# Altium PCB DIO_MCX_mezzanine.PCBDOC (part 1 of 2)
Units mil, origin at the board's own origin, x right, y up, seen from the top; angles counter-clockwise.
Board outline 2519.69 x 3937 mil, 4 copper layers (L1, P2, P3, L4), stack 61.85 mil thick; 119 components, 65 nets, 382 pads, 96 vias.
Unrouted connection lines stored in the file: 38.
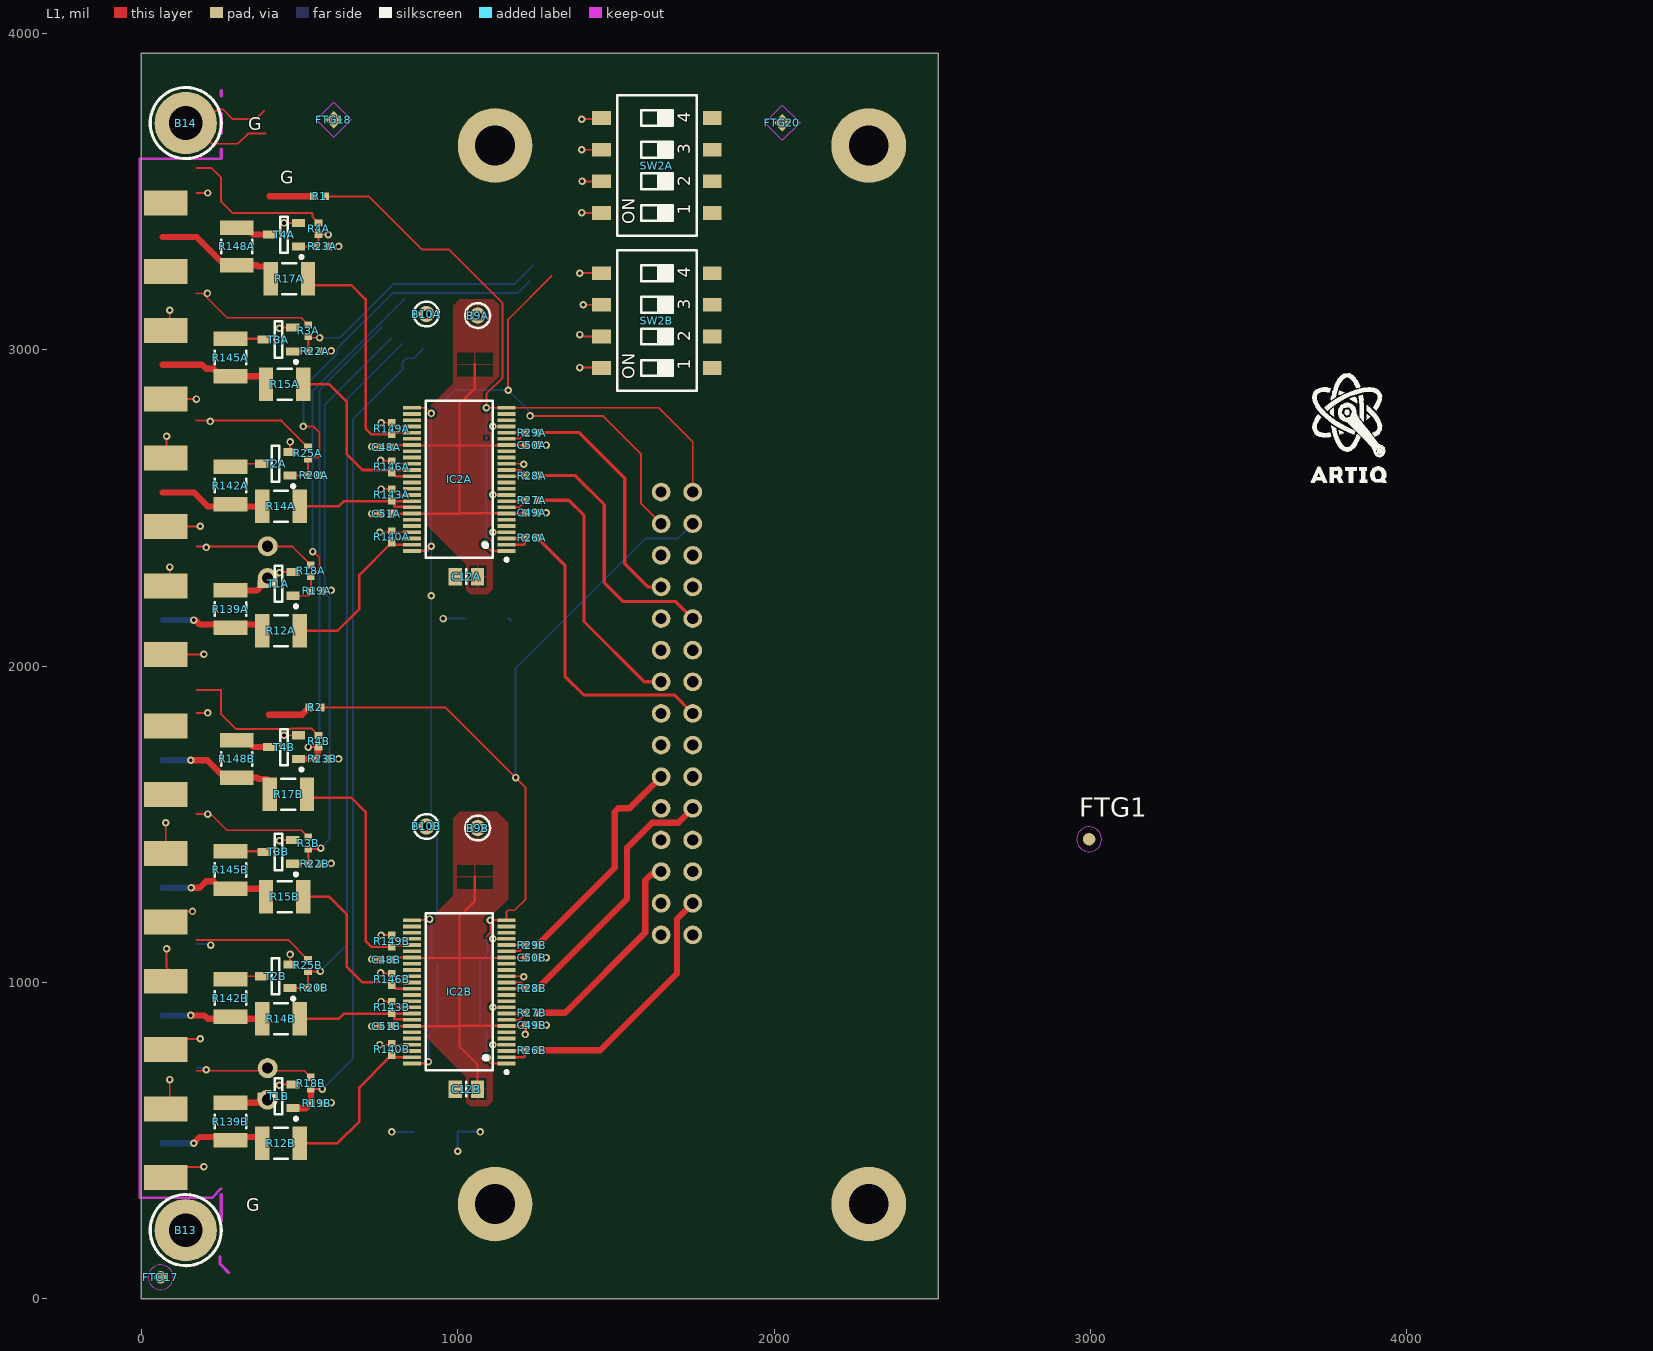
[diagram p0: L1 view]
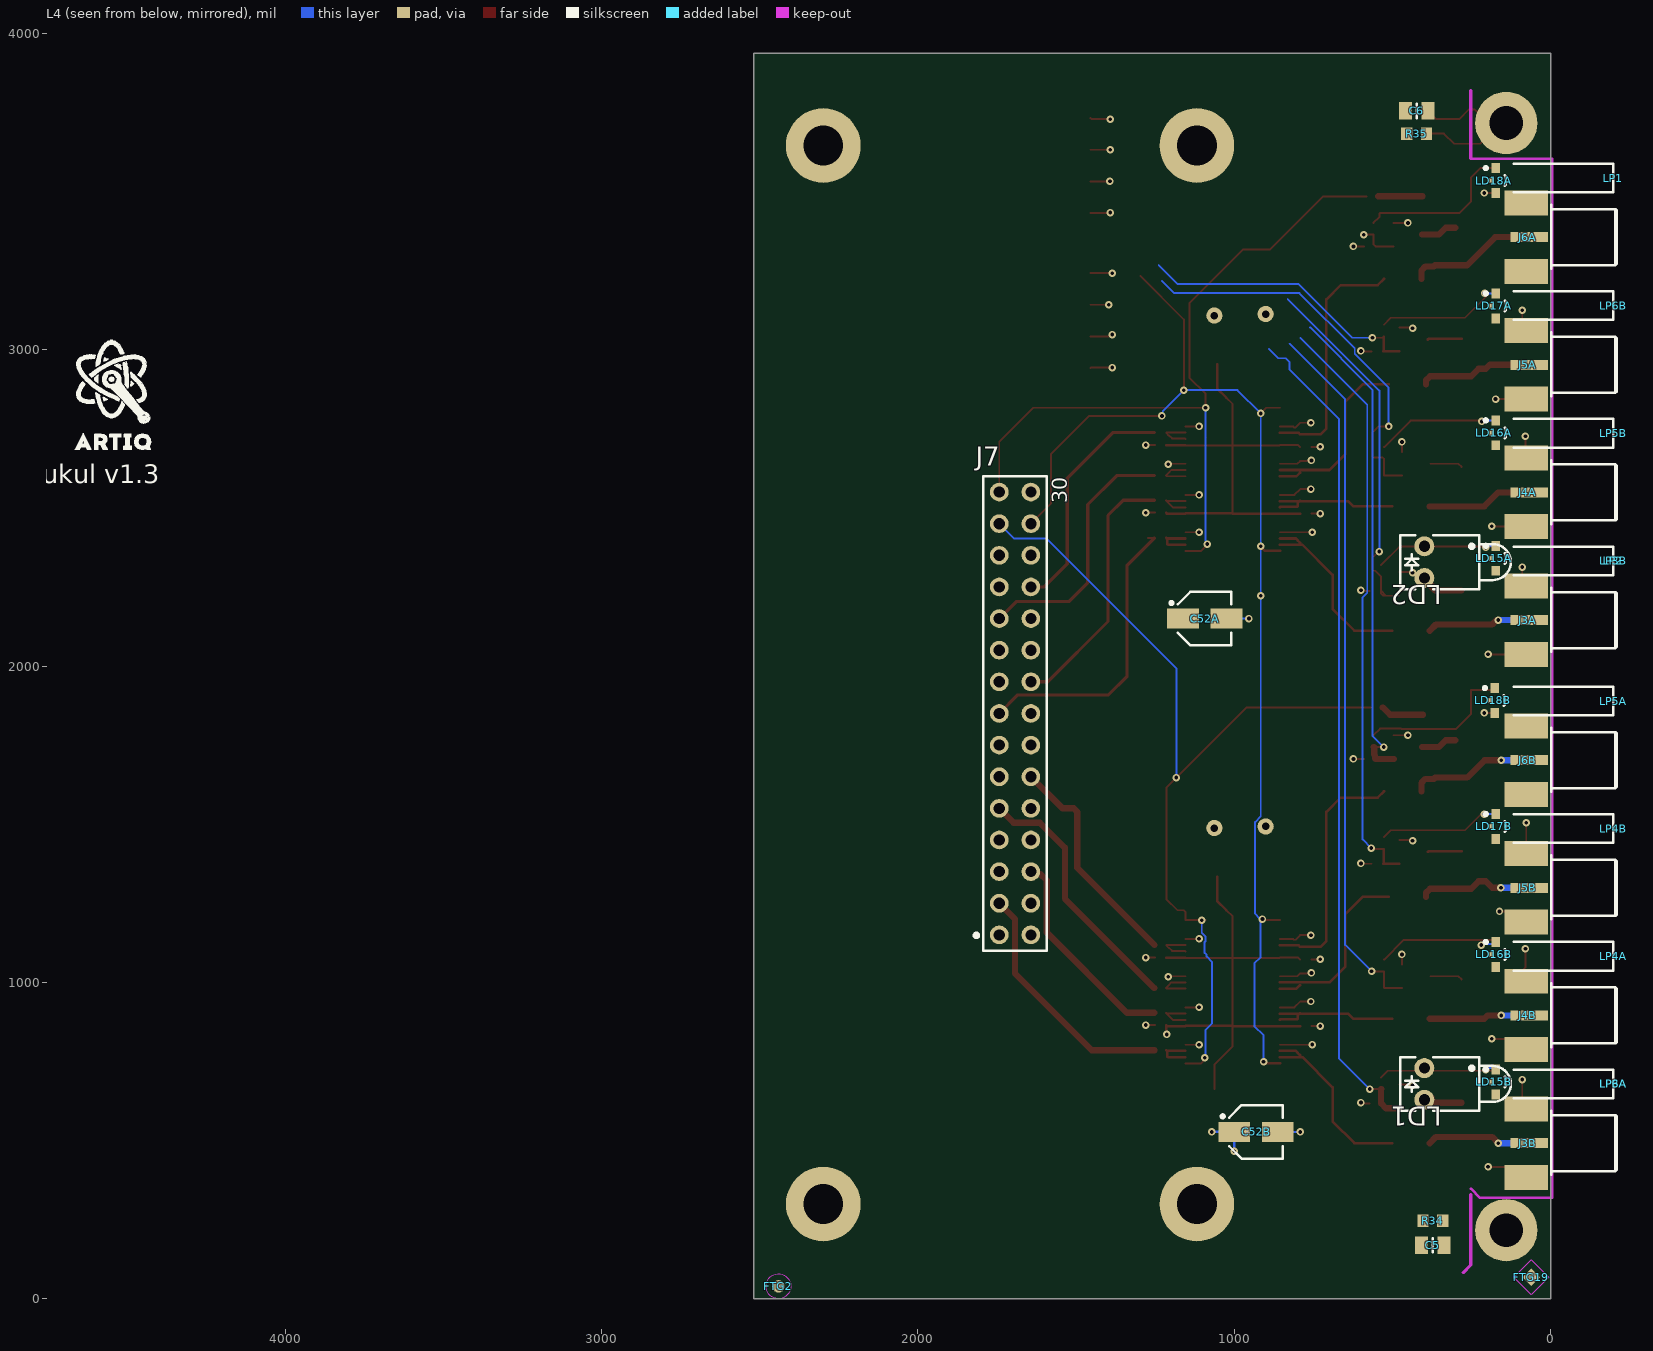
[diagram p1: L4 view, seen from below]
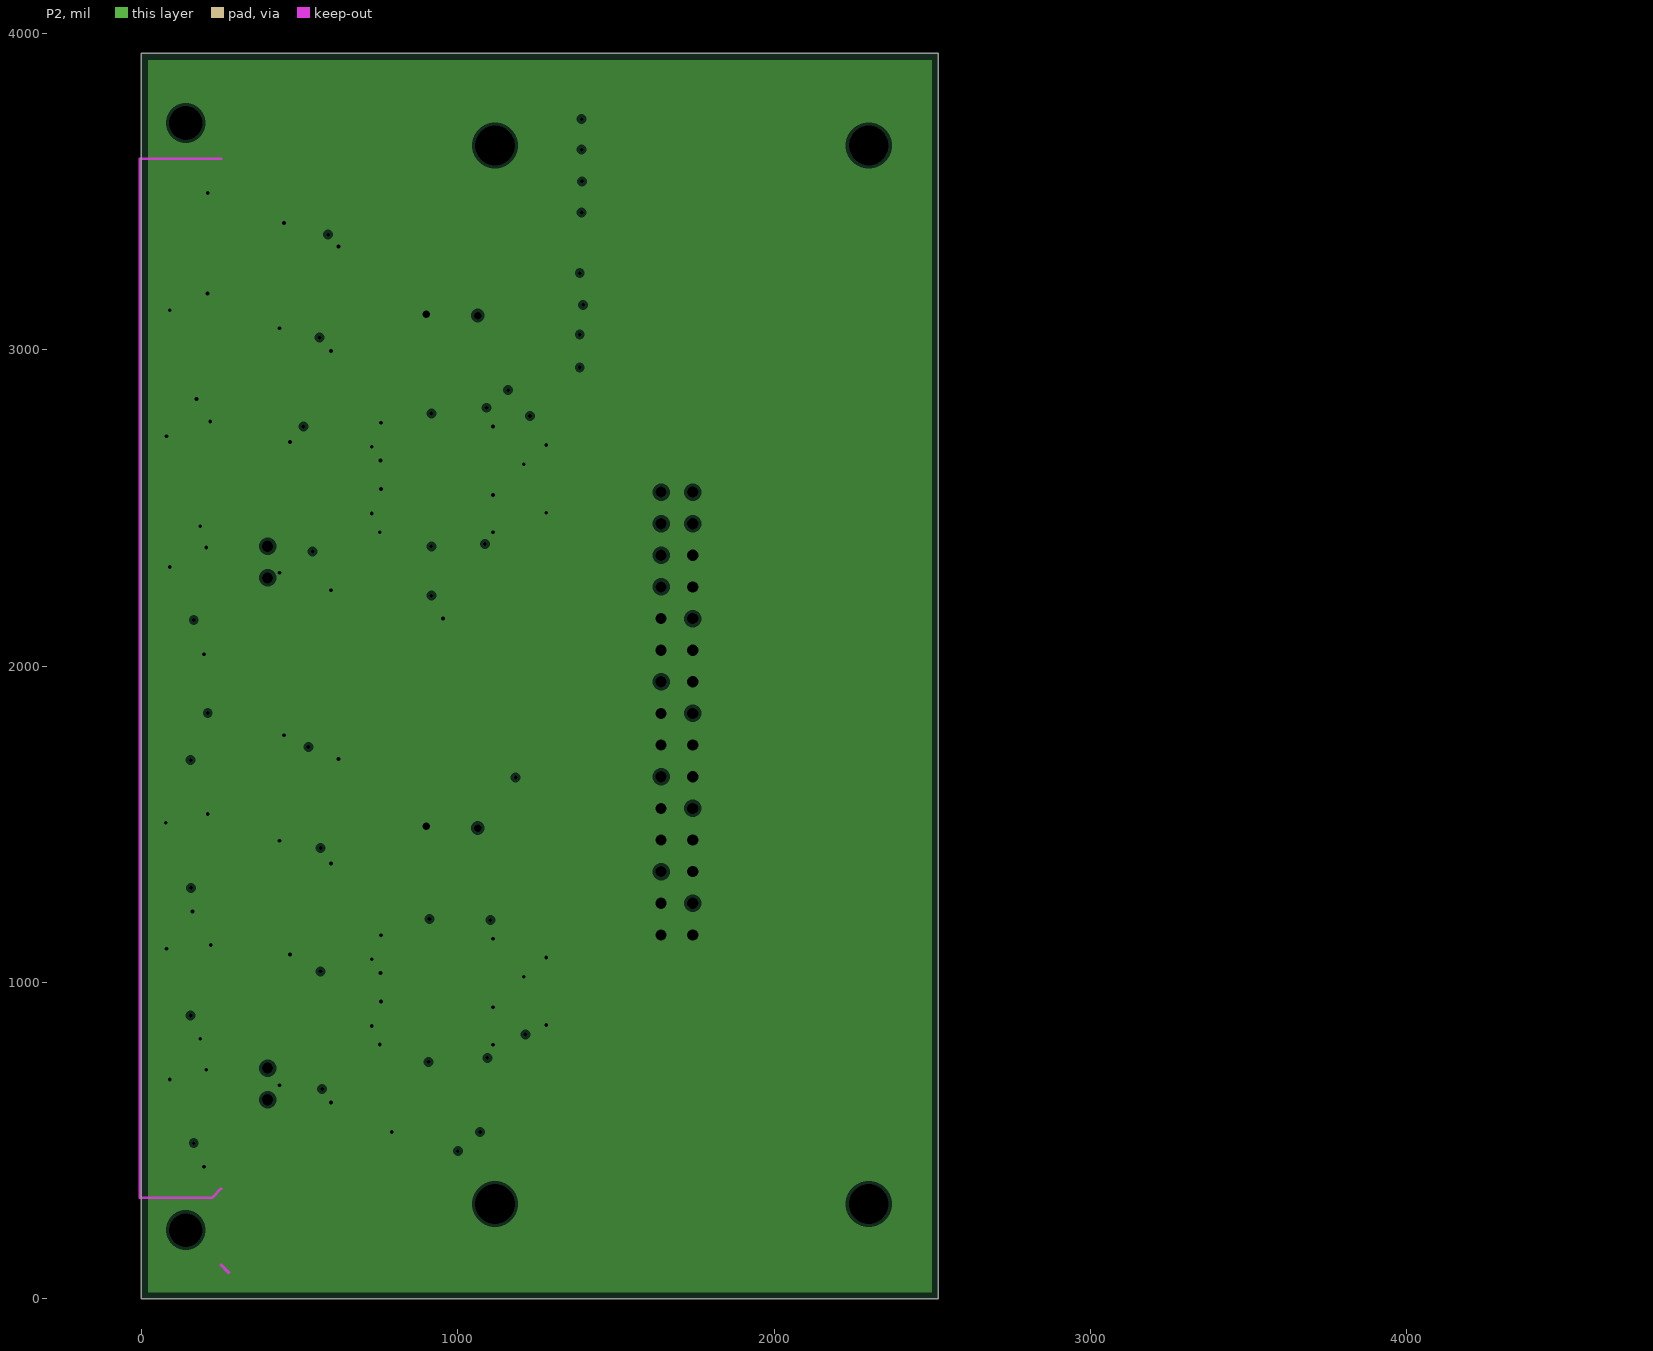
[diagram p2: P2, clearances drawn from the general rule]
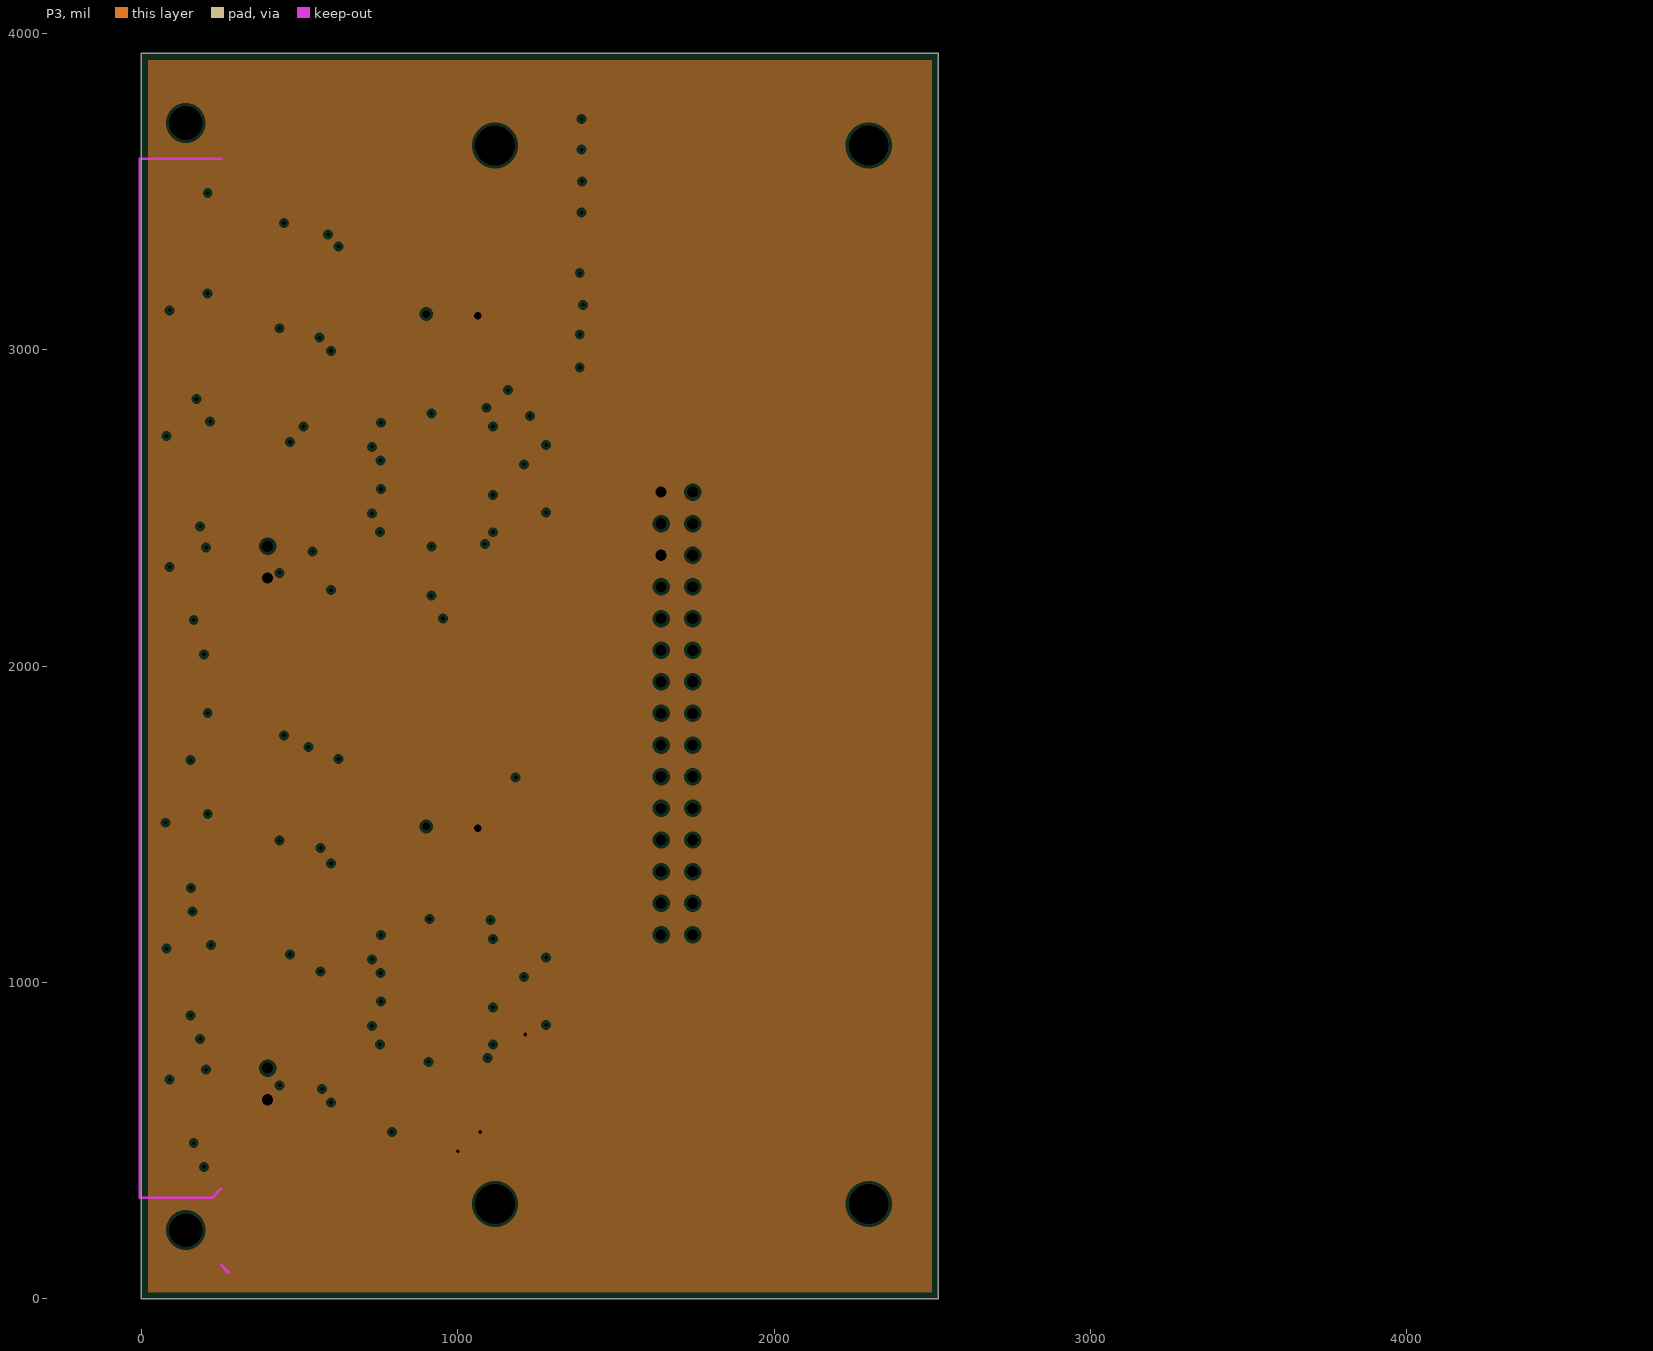
[diagram p3: P3, clearances drawn from the general rule]

## Layer stack, top to bottom
Top Solder: solder mask 1.339, Solder Resist, Dk 3.5
L1: signal copper 1.3779
Dielectric 2: prepreg 7.874, 7628, Dk 4.1
P2: plane copper 0.7087, net GND
Dielectric 3: prepreg 41.9291, PP-006, Dk 4.1
P3: plane copper 0.7087, net P3V3
Dielectric 1: prepreg 7.874, 7628, Dk 4.1
L4: signal copper 1.3779
Bottom Solder: solder mask 1.339, Solder Resist, Dk 3.5

## Board outline
0,300.2 0,3189.96 0,3622.05 0,3937 2519.68,3937 2519.69,0 0,0

## Design rules (kind name [scope] priority, off if disabled: settings)
AcuteAngle AcuteAngle_GND [InNet('GND')] p1: minimum=5.00000000000000E+0001 checktracksonly=FALSE
AcuteAngle [All] p2: minimum=5.00000000000000E+0001 checktracksonly=FALSE
Clearance Clearance_1 [InPolygon vs (InDifferentialPairClass('All Differential Pairs'))] p1: gap=10 ignorepadtopadclearanceinfootprint=FALSE except(0: Arc-Hole Track-Hole SMDPad-Hole THPad-Hole Via-Hole Fill-Hole Poly-Hole Region-Hole Text-Hole; 20: Track-Poly)
Clearance Clearance_KeepOut [OnLayer('Keep-Out Layer') vs NOT (InComponent('J8') OR InComponent('J11'))] p2: gap=5 ignorepadtopadclearanceinfootprint=FALSE
Clearance Clearance_50_Ohms [InNetClass('50_Ohms')] p3: gap=7.87 ignorepadtopadclearanceinfootprint=FALSE except(0: Arc-Hole Track-Hole SMDPad-Hole THPad-Hole Via-Hole Fill-Hole Poly-Hole Region-Hole Text-Hole)
Clearance Clearance_DiffPair_1 [(InDifferentialPairClass('All Differential Pairs')) vs (InDifferentialPairClass('All Differential Pairs'))] p4 off: gap=11.81 ignorepadtopadclearanceinfootprint=FALSE except(0: Arc-Hole Track-Hole SMDPad-Hole THPad-Hole Via-Hole Fill-Hole Poly-Hole Region-Hole Text-Hole)
Clearance [Not (OnLayer('Keep-Out Layer'))] p5: gap=5 ignorepadtopadclearanceinfootprint=FALSE except(0: Arc-Hole Track-Hole SMDPad-Hole THPad-Hole Via-Hole Fill-Hole Poly-Hole Region-Hole Text-Hole; 8: Arc-Poly Track-Poly SMDPad-Poly THPad-Poly Via-Poly Fill-Poly Poly-Poly)
Clearance Clearance_abs [All] p6: gap=5 ignorepadtopadclearanceinfootprint=FALSE
ComponentClearance Clearance_ERNI [(HasFootprint('ERMET ZD 3-10 CONNECTOR')) vs (HasFootprint('ERMET ZD 3-10 CONNECTOR'))] p1: gap=0 collisioncheckmode=3 verticalgap=10 showdistances=FALSE
ComponentClearance Clearance_Radiall_Placement [HasFootprint('Coaxipack2') vs HasFootprint('Coaxipack2')] p2: gap=0 collisioncheckmode=3 verticalgap=10 showdistances=FALSE
ComponentClearance [All] p3: gap=10 collisioncheckmode=3 verticalgap=10 showdistances=FALSE
DiffPairsRouting CLK_DiffPairsRouting [(InDifferentialPairClass('All Differential Pairs'))] p1: maxlimit=7 minlimit=5 mostfreqgap=6 toplayer_minwidth=6 toplayer_maxwidth=6 toplayer_prefwidth=6 bottomlayer_minwidth=6 bottomlayer_maxwidth=6 bottomlayer_prefwidth=6 maxuncoupledlength=393.7
FabricationTestPointUsage TestPointUsage [All] p1: valid=0 allowmultiple=FALSE
FabricationTestpoint Testpoint [(IsPad And (OnTopLayer Or OnBottomLayer))] p1: side=3 testpointundercomponent=TRUE minsize=40 maxsize=100 preferedsize=60 minholesize=0 maxholesize=40 preferedholesize=32 testpointgrid=1 allowsidetop=TRUE allowsidebottom=TRUE usegrid=TRUE gridtolerance=0.01
Height BottomHeight [All] p1: minheight=0 maxheight=787.4 prefheight=393.7
Height TopHeight [OnLayer('Top Layer (LO)')] p2: minheight=0 maxheight=98.43 prefheight=39.37
HoleSize [All] p1: absolutevalues=TRUE maxlimit=196.85 minlimit=7.87 maxpercent=80.000 minpercent=20.000
HoleToHoleClearance [All] p1: gap=7.87 allowstackedmicrovias=TRUE
Length [All] p1 off: maxlimit=100000 minlimit=0
MatchedLengths MatchLengths_IC10_Passives_IC13A,IC13B,IC13C,IC13D,IC2A,IC2B,IC2C,IC2D_1 [InxSignalClass('xSignals_IC10_Passives_IC13A,IC13B,IC13C,IC13D,IC2A,IC2B,IC2C,IC2D_MatchLengthsClass')] p1: tolerance=100 checknetsindiffpair=FALSE checkdiffpairvsdiffpair=TRUE checkxsignals=TRUE checkothers=TRUE
MatchedLengths MatchLengths_xSignals_IC10_Passives_1 [InxSignalClass('xSignals_IC10_Passives_MatchLengthsClass_1')] p2: tolerance=100 checknetsindiffpair=FALSE checkdiffpairvsdiffpair=TRUE checkxsignals=TRUE checkothers=TRUE
MatchedLengths MatchLengths_xSignals_IC10_IC13A,IC13B,IC13C,IC13D,IC2A,IC2B,IC2C,IC2D_1 [InxSignalClass('xSignals_IC10_IC13A,IC13B,IC13C,IC13D,IC2A,IC2B,IC2C,IC2D_MatchLengthsClass')] p3: tolerance=100 checknetsindiffpair=FALSE checkdiffpairvsdiffpair=TRUE checkxsignals=TRUE checkothers=TRUE
MatchedLengths MatchLengths_IC10_Passives_IC13A,IC13B,IC13C,IC13D,IC2A,IC2B,IC2C,IC2D [InxSignalClass('xSignals_IC10_Passives_IC13A,IC13B,IC13C,IC13D,IC2A,IC2B,IC2C,IC2D_MatchLengthsClass')] p4: tolerance=100 checknetsindiffpair=FALSE checkdiffpairvsdiffpair=TRUE checkxsignals=TRUE checkothers=TRUE
MatchedLengths MatchLengths_xSignals_IC10_Passives [InxSignalClass('xSignals_IC10_Passives_MatchLengthsClass')] p5: tolerance=100 checknetsindiffpair=FALSE checkdiffpairvsdiffpair=TRUE checkxsignals=TRUE checkothers=TRUE
MatchedLengths MatchLengths_xSignals_IC10_IC13A,IC13B,IC13C,IC13D,IC2A,IC2B,IC2C,IC2D [InxSignalClass('xSignals_IC10_IC13A,IC13B,IC13C,IC13D,IC2A,IC2B,IC2C,IC2D_MatchLengthsClass')] p6: tolerance=100 checknetsindiffpair=FALSE checkdiffpairvsdiffpair=TRUE checkxsignals=TRUE checkothers=TRUE
MatchedLengths MatchLengths_xSignals_IC10_IC23A,IC23B,IC23C,IC23D [InxSignalClass('xSignals_IC10_IC23A,IC23B,IC23C,IC23D_MatchLengthsClass')] p7: tolerance=100 checknetsindiffpair=FALSE checkdiffpairvsdiffpair=TRUE checkxsignals=TRUE checkothers=TRUE
MatchedLengths Update [InxSignalClass('UPDATE')] p8: tolerance=196.85 checknetsindiffpair=FALSE checkdiffpairvsdiffpair=TRUE checkxsignals=TRUE checkothers=TRUE
MatchedLengths RFSW [InxSignalClass('RFSW')] p9: tolerance=196.85 checknetsindiffpair=FALSE checkdiffpairvsdiffpair=TRUE checkxsignals=TRUE checkothers=TRUE
MatchedLengths "IO 11 15" [InxSignalClass('IO11_15')] p10: tolerance=196.85 checknetsindiffpair=FALSE checkdiffpairvsdiffpair=TRUE checkxsignals=TRUE checkothers=TRUE
MatchedLengths "DDS SYNC" [InxSignalClass('DDSx_SYNC')] p11: tolerance=196.85 checknetsindiffpair=FALSE checkdiffpairvsdiffpair=TRUE checkxsignals=TRUE checkothers=TRUE
MatchedLengths "DDS RESET" [InxSignalClass('DDS_RESET')] p12: tolerance=196.85 checknetsindiffpair=FALSE checkdiffpairvsdiffpair=TRUE checkxsignals=TRUE checkothers=TRUE
MatchedLengths "CLK IC13" [InxSignalClass('CLK IC13')] p13: tolerance=196.85 checknetsindiffpair=FALSE checkdiffpairvsdiffpair=TRUE checkxsignals=TRUE checkothers=TRUE
MinimumAnnularRing MinimumAnnularRing_Blind [(InNetClass('50_Ohms') OR InDifferentialPairClass('All Differential Pairs'))] p1: minimumring=3.94
MinimumAnnularRing [All] p2: minimumring=3.94
MinimumSolderMaskSliver [All] p1: minsoldermaskwidth=1.97
PlaneClearance [All] p1: clearance=9.84
PlaneConnect PlaneConnect_pad [InPadClass('All Pads')] p1: planeconnectstyle=Relief reliefexpansion=20 reliefentries=4 reliefconductorwidth=10 reliefairgap=10
PlaneConnect [All] p2: planeconnectstyle=Direct reliefexpansion=20 reliefentries=4 reliefconductorwidth=10 reliefairgap=10
PolygonConnect PolygonConnect_pad [IsPad] p1: connectstyle=Relief reliefconductorwidth=5.91 reliefentries=4 polygonreliefangle="90 Angle" airgapwidth=6
PolygonConnect [All] p2: connectstyle=Direct reliefconductorwidth=10 reliefentries=4 polygonreliefangle="90 Angle" airgapwidth=10
RoomDefinition MCX_Mezzanine [InComponentClass('MCX_Mezzanine')] p1: confinementstyle=ConfineIn formatcopy=TRUE lockcomponents=FALSE outline 2562.99,-3.93 3192.92,-3.93 3192.92,1649.61 2562.99,1649.61
RoomDefinition U_MCX_BufferB [InComponentClass('U_MCX_BufferB')] p2: confinementstyle=ConfineIn formatcopy=TRUE lockcomponents=FALSE outline 0,347.14 1627.8,347.14 1627.8,1998.95 0,1998.95
RoomDefinition U_MCX_BufferA [InComponentClass('U_MCX_BufferA')] p3: confinementstyle=ConfineIn formatcopy=TRUE lockcomponents=FALSE outline 0,1967.22 1627.8,1967.22 1627.8,3619.03 0,3619.03
RoutingVias [All] p1: holewidth=11.81 width=23.62 viastyle="Through Hole" minholewidth=11.81 minwidth=23.62 maxholewidth=23.62 maxwidth=39.37
SMDNeckDown [All] p1: percent=100.000
SMDToCorner [All] p1: distance=78740
SMDToPlane [All] p1: distance=0
SilkToSilkClearance [All] p1: silktosilkclearance=0
SilkToSolderMaskClearance SilkscreenOverComponentPads [IsPad] p1: minsilkscreentomaskgap=0 clearancetoexposedcopper=TRUE
SolderMaskExpansion SolderMaskExpansion_GND_VIA [IsVia AND InNet('GND')] p1: expansion=-3.94
SolderMaskExpansion [All] p2: expansion=1.97
Width CLK_DiffPairs_Width [(InDifferentialPairClass('All Differential Pairs'))] p1: maxlimit=6 minlimit=6 preferedwidth=6 minimp=50.000000 maximp=50.000000 favimp=50.000000 checkconnectedcopper=TRUE
Width Width-SE [All] p2: maxlimit=19.68 minlimit=6 preferedwidth=6 minimp=49.000000 maximp=51.000000 favimp=50.000000
18 further rules are at their usual default settings.

## Classes and differential pairs
channel class MCX_Buffer: U_MCX_BufferA U_MCX_BufferB
component class U_MCX_BufferB: B9B B10B C12B C48B C49B C50B C51B C52B IC2B J3B J4B J5B J6B LD15B LD16B LD17B LD18B LP3B LP4B LP5B LP6B R3B R4B R12B R14B R15B R17B R18B R19B R20B R22B R23B R25B R26B R27B R28B R29B R139B R140B R142B R143B R145B R146B R148B R149B SW2B T1B T2B T3B T4B
component class MCX_Mezzanine: B13 B14 C5 C6 FTG1 FTG2 FTG17 FTG18 FTG19 FTG20 J7 LD1 LD2 LP1 LP2 R1 R2 R34 R35
component class U_MCX_BufferA: B9A B10A C12A C48A C49A C50A C51A C52A IC2A J3A J4A J5A J6A LD15A LD16A LD17A LD18A LP3A LP4A LP5A LP6A R3A R4A R12A R14A R15A R17A R18A R19A R20A R22A R23A R25A R26A R27A R28A R29A R139A R140A R142A R143A R145A R146A R148A R149A SW2A T1A T2A T3A T4A

## Components (designator, comment, footprint, x,y, rotation, side; value= is the part's Value field where it differs from the comment)
B9A "Plated Hole" c130h60 1062.99,3108.3 r270 top (schematic designator B9)
B9B "Plated Hole" c130h60 1062.99,1488.22 r270 top (schematic designator B9)
B10A "Plated Hole" c130h60 900.59,3113.19 r270 top (schematic designator B10)
B10B "Plated Hole" c130h60 900.59,1493.11 r270 top (schematic designator B10)
B13 "Plated Hole" MTG270_500 140,217 r180 top locked
B14 "Plated Hole" MTG270_500 140,3717 r180 top locked
C5 "Undefined" CAPC2012X135N 372.05,169.29 r180 bottom
C6 "Undefined" CAPC2012X135N 423.23,3755.43 r180 bottom
C12A "22uF" CAPC2012X135N 1027.56,2283.05 r0 top (schematic designator C12)
C12B "22uF" CAPC2012X135N 1027.56,662.97 r0 top (schematic designator C12)
C48A "100nF" CAPC1005X55N 773.62,2692.17 r0 top (schematic designator C48)
C48B "100nF" CAPC1005X55N 773.62,1072.09 r0 top (schematic designator C48)
C49A "100nF" CAPC1005X55N 1233.27,2485.28 r180 top (schematic designator C49)
C49B "100nF" CAPC1005X55N 1233.27,865.2 r180 top (schematic designator C49)
C50A "100nF" CAPC1005X55N 1233.27,2698.82 r180 top (schematic designator C50)
C50B "100nF" CAPC1005X55N 1233.27,1078.74 r180 top (schematic designator C50)
C51A "100nF" CAPC1005X55N 773.23,2482.28 r0 top (schematic designator C51)
C51B "100nF" CAPC1005X55N 773.23,862.2 r0 top (schematic designator C51)
C52A "10uF" CAPAE430X540N 1093.41,2150.39 r180 bottom locked (schematic designator C52)
C52B "10uF" CAPAE430X540N 931.22,527.56 r180 bottom locked (schematic designator C52)
FTG1 "Use only in PCB" FIDUCIAL_TOP_C100-200 2996.07,1452.76 r90 top
FTG2 "Use only in PCB" FIDUCIAL_TOP_C100-200 2440.94,39.37 r90 bottom
FTG17 "Use only in PCB" FIDUCIAL_TOP_C100-200 61.02,67.91 r270 top
FTG18 "Use only in PCB" FIDUCIAL_TOP_S100-200 607.68,3727.59 r270 top
FTG19 "Use only in PCB" FIDUCIAL_TOP_S100-200 61.02,67.91 r90 bottom
FTG20 "Use only in PCB" FIDUCIAL_TOP_S100-200 2026.58,3717.68 r270 top
IC2A "74LVT162245MTD" SOP50P810X120-48N 1004.92,2590.55 r180 top locked (schematic designator IC2)
IC2B "74LVT162245MTD" SOP50P810X120-48N 1004.92,970.47 r180 top locked (schematic designator IC2)
J3A "MCX" Belfuse_133-3701-801 165.35,2145.67 r180 bottom locked (schematic designator J3)
J3B "MCX" Belfuse_133-3701-801 165.35,491.84 r180 bottom locked (schematic designator J3)
J4A "MCX" Belfuse_133-3701-801 165.35,2549.21 r180 bottom locked (schematic designator J4)
J4B "MCX" Belfuse_133-3701-801 165.35,895.67 r180 bottom locked (schematic designator J4)
J5A "MCX" Belfuse_133-3701-801 165.35,2952.76 r180 bottom locked (schematic designator J5)
J5B "MCX" Belfuse_133-3701-801 165.35,1299.21 r180 bottom locked (schematic designator J5)
J6A "MCX" Belfuse_133-3701-801 165.35,3356.3 r180 bottom locked (schematic designator J6)
J6B "MCX" Belfuse_133-3701-801 165.35,1702.76 r180 bottom locked (schematic designator J6)
J7 "AMPMODU" TYCO_1-215307-5 1692.91,1400.39 r90 bottom locked
LD1 "Red" LED_DIALIGHT_551-1107F 398.94,679.14 r0 bottom locked
LD2 "Red" LED_DIALIGHT_551-1107F 398.94,2328.89 r0 bottom locked
LD15A "Green" LED_AVAGO_HSME-C120 173.23,2340.92 r270 bottom (schematic designator LD15)
LD15B "Green" LED_AVAGO_HSME-C120 173.23,685.61 r270 bottom (schematic designator LD15)
LD16A "Green" LED_AVAGO_HSME-C120 173.23,2737.67 r270 bottom (schematic designator LD16)
LD16B "Green" LED_AVAGO_HSME-C120 173.23,1088.58 r270 bottom (schematic designator LD16)
LD17A "Green" LED_AVAGO_HSME-C120 173.23,3139.07 r270 bottom (schematic designator LD17)
LD17B "Green" LED_AVAGO_HSME-C120 173.23,1493.11 r270 bottom (schematic designator LD17)
LD18A "Green" LED_AVAGO_HSME-C120 173.23,3535.17 r270 bottom (schematic designator LD18)
LD18B "Green" LED_AVAGO_HSME-C120 176.18,1891.47 r270 bottom (schematic designator LD18)
LP1 "=Color" FIX&FASTEN-LEMB2-8V0-F -198.82,3543.05 r0 bottom locked
LP2 "=Color" FIX&FASTEN-LEMB2-8V0-F -198.82,2332.68 r0 bottom locked
LP3A "Color" FIX&FASTEN-LEMB2-8V0-F -198.82,679.14 r0 bottom locked (schematic designator LP3)
LP3B "Color" FIX&FASTEN-LEMB2-8V0-F -198.82,2332.68 r0 bottom locked (schematic designator LP3)
LP4A "Color" FIX&FASTEN-LEMB2-8V0-F -198.82,1082.68 r0 bottom locked (schematic designator LP4)
LP4B "Color" FIX&FASTEN-LEMB2-8V0-F -198.82,1486.22 r0 bottom locked (schematic designator LP4)
LP5A "Color" FIX&FASTEN-LEMB2-8V0-F -198.82,1889.76 r0 bottom locked (schematic designator LP5)
LP5B "Color" FIX&FASTEN-LEMB2-8V0-F -198.82,2736.22 r0 bottom locked (schematic designator LP5)
LP6A "Color" FIX&FASTEN-LEMB2-8V0-F -198.82,679.14 r0 bottom locked (schematic designator LP6)
LP6B "Color" FIX&FASTEN-LEMB2-8V0-F -198.82,3139.76 r0 bottom locked (schematic designator LP6)
R1 "1k" RESC1005X40N 563.54,3485.17 r0 top
R2 "1k" RESC1005X40N 549.21,1869.56 r0 top
R3A "1k" RESC1005X40N 527.56,3060.28 r90 top (schematic designator R3)
R3B "1k" RESC1005X40N 527.56,1440.2 r90 top (schematic designator R3)
R4A "1k" RESC1005X40N 560,3382.68 r90 top (schematic designator R4)
R4B "1k" RESC1005X40N 560,1762.6 r90 top (schematic designator R4)
R12A "30R" RESC3225X70N 440.94,2111.92 r0 top (schematic designator R12)
R12B "30R" RESC3225X70N 440.94,491.84 r0 top (schematic designator R12)
R14A "30R" RESC3225X70N 440.94,2504.97 r0 top (schematic designator R14)
R14B "30R" RESC3225X70N 440.94,884.89 r0 top (schematic designator R14)
R15A "30R" RESC3225X70N 452.76,2890.68 r0 top (schematic designator R15)
R15B "30R" RESC3225X70N 452.76,1270.6 r0 top (schematic designator R15)
R17A "30R" RESC3225X70N 467.48,3224.41 r0 top (schematic designator R17)
R17B "30R" RESC3225X70N 464.24,1594.49 r0 top (schematic designator R17)
R18A "1k" RESC1005X40N 535.43,2301.55 r90 top (schematic designator R18)
R18B "1k" RESC1005X40N 535.43,681.48 r90 top (schematic designator R18)
R19A "10k" RESC1005X40N 554.13,2237.84 r180 top (schematic designator R19)
R19B "10k" RESC1005X40N 554.13,617.76 r180 top (schematic designator R19)
R20A "10k" RESC1005X40N 545.04,2603.28 r180 top (schematic designator R20)
R20B "10k" RESC1005X40N 545.04,983.2 r180 top (schematic designator R20)
R22A "10k" RESC1005X40N 547.24,2995.23 r180 top (schematic designator R22)
R22B "10k" RESC1005X40N 547.24,1375.15 r180 top (schematic designator R22)
R23A "10k" RESC1005X40N 571.85,3326.77 r180 top (schematic designator R23)
R23B "10k" RESC1005X40N 571.85,1706.69 r180 top (schematic designator R23)
R25A "1k" RESC1005X40N 526.54,2673.67 r90 top (schematic designator R25)
R25B "1k" RESC1005X40N 526.54,1053.59 r90 top (schematic designator R25)
R26A "22" RESC1005X40N 1233.27,2405.51 r0 top (schematic designator R26)
R26B "22" RESC1005X40N 1233.27,785.43 r0 top (schematic designator R26)
R27A "22" RESC1005X40N 1234.06,2524.26 r0 top (schematic designator R27)
R27B "22" RESC1005X40N 1234.06,904.18 r0 top (schematic designator R27)
R28A "22" RESC1005X40N 1234.06,2602.36 r0 top (schematic designator R28)
R28B "22" RESC1005X40N 1234.06,982.28 r0 top (schematic designator R28)
R29A "22" RESC1005X40N 1233.27,2738.19 r0 top (schematic designator R29)
R29B "22" RESC1005X40N 1233.27,1118.11 r0 top (schematic designator R29)
R34 "0" RESC1608X55N 372.05,246.79 r0 bottom
R35 "0" RESC1608X55N 423.23,3683.79 r0 bottom
R139A "49R9" RESC3225X70N 281.5,2180.43 r270 top (schematic designator R139)
R139B "49R9" RESC3225X70N 281.5,560.35 r270 top (schematic designator R139)
R140A "10k" RESC1005X40N 791.73,2408.61 r270 top (schematic designator R140)
R140B "10k" RESC1005X40N 791.73,788.53 r270 top (schematic designator R140)
R142A "49R9" RESC3225X70N 281.5,2570.87 r270 top (schematic designator R142)
R142B "49R9" RESC3225X70N 281.5,950.79 r270 top (schematic designator R142)
R143A "10k" RESC1005X40N 791.34,2541.34 r270 top (schematic designator R143)
R143B "10k" RESC1005X40N 791.34,921.26 r270 top (schematic designator R143)
R145A "49R9" RESC3225X70N 281.5,2975.64 r270 top (schematic designator R145)
R145B "49R9" RESC3225X70N 281.5,1355.56 r270 top (schematic designator R145)
R146A "10k" RESC1005X40N 791.73,2629.92 r270 top (schematic designator R146)
R146B "10k" RESC1005X40N 791.73,1009.84 r270 top (schematic designator R146)
R148A "49R9" RESC3225X70N 301.18,3326.77 r270 top (schematic designator R148)
R148B "49R9" RESC3225X70N 301.18,1706.69 r270 top (schematic designator R148)
R149A "10k" RESC1005X40N 791.73,2750.96 r270 top (schematic designator R149)
R149B "10k" RESC1005X40N 791.73,1130.88 r270 top (schematic designator R149)
SW2A "Switch" SW_OMRON_A6S-4102-H 1629.8,3582.68 r180 top locked (schematic designator SW2)
SW2B "Switch" SW_OMRON_A6S-4102-H 1629.8,3092.37 r180 top locked (schematic designator SW2)
T1A "BSS138LT1G" SOT95P240X110-3N 433.2,2259.99 r180 top (schematic designator T1)
T1B "BSS138LT1G" SOT95P240X110-3N 433.2,639.91 r180 top (schematic designator T1)
T2A "BSS138LT1G" SOT95P240X110-3N 424.53,2639.76 r180 top (schematic designator T2)
T2B "BSS138LT1G" SOT95P240X110-3N 424.53,1019.68 r180 top (schematic designator T2)
T3A "BSS138LT1G" SOT95P240X110-3N 433.07,3032.63 r180 top (schematic designator T3)
T3B "BSS138LT1G" SOT95P240X110-3N 433.07,1412.55 r180 top (schematic designator T3)
T4A "BSS138LT1G" SOT95P240X110-3N 450.79,3364.17 r180 top (schematic designator T4)
T4B "BSS138LT1G" SOT95P240X110-3N 450.79,1744.09 r180 top (schematic designator T4)

## Footprints (in the part's own frame and the unit in brackets; to place one, negate y for a bottom-side part, rotate by r counter-clockwise, add the part's x,y. Pads: shape width x height; smd on the part's side, far side on the other; paste and mask are expansions set on the pad)
Belfuse_133-3701-801 [mm] "50 Ohm, RF Connector, MCX Right Angle PCB Receptacle Jack"
  rect 3x0.8 smd: 1(2.5,0)
  rect 3.5x2 smd far side: 2(2.25,-2.75) 2(2.25,2.75)
  rect 3.5x2 smd: 2(2.25,-2.75) 2(2.25,2.75)
  silkscreen extent 4.25,-2.54 9.5,2.6, body extent 1.08,-3.18 9.61,3.17, height 3.42
c130h60 [mm] "Plated Through Hole: Hole Dia.=0.6mm Pad Dia.=1.30mm"
  round 1.3 hole 0.6: 1(0,0)
  silkscreen extent -1,-1 1,1
CAPAE430X540N [mm] "Capacitor, Aluminium Electrolytric, 4.3mm L X 4.3mm W X 5.4mm H, IPC Medium Density"
  rect 2.55x1.6 smd: 1(-1.75,0) 2(1.75,0)
  silkscreen extent -2.8,-2.15 2.15,2.15, body extent -2.75,-2.25 2.75,2.25, height 5.7
CAPC1005X55N [mm] "Capacitor, Non-Polarized, Chip; 1.00mm L X 0.50mm W X 0.70mm H, IPC Medium Density"
  rect 0.62x0.62 smd: 1(-0.45,0) 2(0.45,0)
  body extent -0.52,-0.27 0.53,0.28, height 0.55
CAPC2012X135N [mm] "Chip Capacitor, Body 2.0x1.25mm, IPC Medium Density"
  rect 1.05x1.4 smd: 1(-0.9,0) 2(0.9,0)
  silkscreen extent 0,-0.58 0,0.58, body extent -1.05,-0.67 1.05,0.68, height 1.25
FIDUCIAL_TOP_C100-200 [mm] "Round Fiducial Target, Top Layer, 1.0mm, Top Solder 2.0mm, Keepout =2.0mm"
  round 1 smd paste-0.51 mask+0.5: FTG2(0,0)
  L1 keep-out circle w0.1: c0,0 r1
FIDUCIAL_TOP_S100-200 [mm] "Square Fiducial Target, Top Layer, 1.0mm, Top Solder 2.0mm, Keepout =2.0mm"
  rect 1x1 smd rot 45 paste-0.51 mask+0.5: 1(0,0)
  L1 keep-out region: 1.414,0 0,-1.414 -1.414,0 0,1.414
FIX&FASTEN-LEMB2-8V0-F [mil] "Right Angle Single Element 2.3x8mm Round Lightpipe"
  silkscreen extent 0,-45 315,45, body extent 0,-45 315,45, height 85
LED_AVAGO_HSME-C120 [mm] "Green Chip LED, 2-Leads, Body 1.7x1.1mm, Side Emitting Package"
  rect 0.8x0.7 smd: 1(-1,0) 2(1,0)
  rect 0.4x0.4 smd: 3(0,-0.35)
  silkscreen extent -1.12,-0.92 0.42,0.8, body extent -0.85,-0.3 0.85,0.8, height 0.7
LED_DIALIGHT_551-1107F [mm] "Single 3mm Red LED, Body 6.35x4.32mm, Pin spacing 2.54mm"
  round 1.6 hole 0.9: 1(0,-1.27) 2(0,1.27)
  silkscreen extent -6.94,-2.16 1.95,2.16, body extent -6.94,-2.16 1.95,2.16, height 7.11
MTG270_500 [mm] "Plated Through Hole: Hole Dia.=2.7mm Pad Dia.=5.0mm"
  round 5 hole 2.7: 1(0,0)
RESC1005X40N [mm] "Chip Resistor, EIA 0402, Metric 1005, Body 1.0x0.5mm, IPC Medium Density"
  rect 0.58x0.62 smd: 1(-0.47,0) 2(0.47,0)
  body extent -0.52,-0.27 0.53,0.28, height 0.4
RESC1608X55N [mm] "Chip Resistor, EIA 0603, Metric 1608, Body 1.6x0.8mm, IPC Medium Density"
  rect 0.9x1 smd: 1(-0.8,0) 2(0.8,0)
  body extent -0.87,-0.47 0.88,0.48, height 0.55
RESC3225X70N [mm] "Chip Resistor, EIA 1210, Metric 3225, Body 3.2x2.5mm, IPC Medium Density"
  rect 1.15x2.7 smd: 1(-1.5,0) 2(1.5,0)
  silkscreen extent -0.55,-1.25 0.55,1.25, body extent -1.7,-1.35 1.7,1.35, height 0.7
SOP50P810X120-48N [mm] "SOP, 48-Leads, Body 12.6x6.2mm (max), Pitch 0.50mm, IPC Medium Density"
  rect 1.45x0.3 smd: 1(-3.8,5.75) 2(-3.8,5.25) 3(-3.8,4.75) 4(-3.8,4.25) 5(-3.8,3.75) 6(-3.8,3.25) 7(-3.8,2.75) 8(-3.8,2.25) 9(-3.8,1.75) 10(-3.8,1.25) 11(-3.8,0.75) 12(-3.8,0.25) 13(-3.8,-0.25) 14(-3.8,-0.75) 15(-3.8,-1.25) 16(-3.8,-1.75) 17(-3.8,-2.25) 18(-3.8,-2.75) 19(-3.8,-3.25) 20(-3.8,-3.75) 21(-3.8,-4.25) 22(-3.8,-4.75) 23(-3.8,-5.25) 24(-3.8,-5.75) 25(3.8,-5.75) 26(3.8,-5.25) 27(3.8,-4.75) 28(3.8,-4.25) 29(3.8,-3.75) 30(3.8,-3.25) 31(3.8,-2.75) 32(3.8,-2.25) 33(3.8,-1.75) 34(3.8,-1.25) 35(3.8,-0.75) 36(3.8,-0.25) 37(3.8,0.25) 38(3.8,0.75) 39(3.8,1.25) 40(3.8,1.75) 41(3.8,2.25) 42(3.8,2.75) 43(3.8,3.25) 44(3.8,3.75) 45(3.8,4.25) 46(3.8,4.75) 47(3.8,5.25) 48(3.8,5.75)
  silkscreen extent -3.93,-6.3 2.7,6.57, body extent -4.06,-6.3 4.06,6.3, height 1.2
SOT95P240X110-3N [mm] "SOT23 3-Leads, Pitch 0.95mm, Body 1.3x2.9mm, IPC Medium Density"
  rect 1.05x0.65 smd: 1(-1.15,0.95) 2(-1.15,-0.95) 3(1.15,0)
  silkscreen extent -1.53,-1.45 0.3,1.92, body extent -1.25,-1.5 1.25,1.5, height 1.1
SW_OMRON_A6S-4102-H [mm] "Pitch 2.54mm, Body 11.3x6.4mm, 4 Ways SPST Surface-Mounting DIP Switch, OMRON A6S-H"
  rect 1.5x1.1 smd: 1(-4.45,3.81) 2(-4.45,1.27) 3(-4.45,-1.27) 4(-4.45,-3.81) 5(4.45,-3.81) 6(4.45,-1.27) 7(4.45,1.27) 8(4.45,3.81)
  silkscreen extent -3.2,-5.65 3.2,5.65, body extent -4.9,-5.55 4.9,5.55, height 3.97
TYCO_1-215307-5 [mm] "30 Contacts - Pitch 2.54mm - Dual Row Top Entry Socket"
  round 1.5 hole 0.9: 1(-6.35,1.27) 2(-6.35,-1.27) 3(-3.81,1.27) 4(-3.81,-1.27) 5(-1.27,1.27) 6(-1.27,-1.27) 7(1.27,1.27) 8(1.27,-1.27) 9(3.81,1.27) 10(3.81,-1.27) 11(6.35,1.27) 12(6.35,-1.27) 13(8.89,1.27) 14(8.89,-1.27) 15(11.43,1.27) 16(11.43,-1.27) 17(13.97,1.27) 18(13.97,-1.27) 19(16.51,1.27) 20(16.51,-1.27) 21(19.05,1.27) 22(19.05,-1.27) 23(21.59,1.27) 24(21.59,-1.27) 25(24.13,1.27) 26(24.13,-1.27) 27(26.67,1.27) 28(26.67,-1.27) 29(29.21,1.27) 30(29.21,-1.27)
  silkscreen extent -7.62,-2.54 30.48,3.26, body extent -7.62,-2.53 30.48,2.53, height 7.01

## Part data
B9A B9B B10A B10B: library part PLATED_HOLE0.6_PAD1.3, "Single Terminal Socket", Author="CERN DEM MR", ComponentHeight=0mm, Component Type="Standard (No BOM)", CreateDate=02.03.2016, Family="Plated Hole", HelpURL=Undefined, LatestRevisionDate=02.03.2016, Mounted=No, PackageDescription="Plated Through Hole: Hole Dia.=0.6mm Pad Dia.=1.3mm", Part Description="Plated Through Hole: Hole Dia.=0.6mm Pad Dia.=1.3mm", Part Number=PLATED_HOLE0.6_PAD1.3, Pin Count=1, Sense=No, SMD=No, Socket=No, Status=None
B13 B14: library part PLATED_HOLE2.7_PAD5.0, "Single Terminal Socket", Author="CERN DEM JMW", ComponentHeight=0mm, Component Type="Standard (No BOM)", CreateDate=27.09.2011, Family="Plated Hole", HelpURL=Undefined, LatestRevisionDate=27.09.2011, Mounted=No, PackageDescription="Plated Through Hole: Hole Dia.=2.7mm Pad Dia.=5.0mm", Part Description="Plated Through Hole: Hole Dia.=2.7mm Pad Dia.=5.0mm", Part Number=PLATED_HOLE2.7_PAD5.0, Pin Count=1, Sense=No, SMD=No, Socket=No, Status=None
C5 C6: library part CC0805_NO-VALUE, "Non-polarised capacitor", Case=0805, Manufacturer1 ComponentHeight=1.35mm, Author="CERN DEM JLC", Component Type=Standard, CreateDate=10.12.2008, HelpURL=Undefined, LatestRevisionDate=11.09.2013, Manufacturer=Undefined, Manufacturer Part Number=CC0805_NO-VALUE, Mounted=No, Part Description="Reserved Footprint For 0805(2012) Chip Ceramic Capacitor", Part Number=CC0805_NO-VALUE, Pin Count=2, Sense=No, SMD=Yes, Socket=No, Status=None
C12A C12B: library part CC0805_22UF_16V_10%_X5R, "Non-polarised capacitor", Case=0805, Manufacturer=GENERIC, Manufacturer1 ComponentHeight=1.35mm, Manufacturer1 Example=TDK, Manufacturer1 Part Number=C2012X5R1C226KT, Tolerance=±10%, Voltage=16V, Author="CERN DEM JLC", Component Type=Standard, CreateDate=25.10.2012, HelpURL=\\cern.ch\dfs\Applications\Altium\Datasheets\CC0805_X5R_TDK_C.pdf, LatestRevisionDate=25.10.2012, Manufacturer Part Number=CC0805_22UF_16V_10%_X5R, Mounted=Yes, Part Description="SMD Multilayer Chip Ceramic Capacitor", Part Number=CC0805_22UF_16V_10%_X5R, Pin Count=2, Sense=No, SMD=Yes, Socket=No, Status=Preferred, TC=X5R
C48A C48B C49A C49B C50A C50B C51A C51B: library part CC0402_100NF_16V_10%_X5R, "Non-polarised capacitor", Case=0402, Manufacturer=GENERIC, Manufacturer1 ComponentHeight=0.55mm, Manufacturer1 Example=MURATA, Manufacturer1 Part Number=GRM155R61C104KA88D, Tolerance=±10%, Voltage=16V, Author="CERN DEM JLC", Component Type=Standard, CreateDate=10.12.2013, HelpURL=\\cern.ch\dfs\Applications\Altium\Datasheets\CC0402_X5R_MURATA_GRM.pdf, LatestRevisionDate=10.12.2013, Manufacturer Part Number=CC0402_100NF_16V_10%_X5R, Mounted=Yes, Part Description="SMD Multilayer Chip Ceramic Capacitor", Part Number=CC0402_100NF_16V_10%_X5R, Pin Count=2, Sense=No, SMD=Yes, Socket=No, Status=None, TC=X5R
C52A C52B: library part CAE430-540_10UF_16V_20%, "Polarised capacitor", Case=B, Manufacturer=PANASONIC, Manufacturer Part Number=EEEFK1C100AR, Tolerance=±20%, Voltage=16V, Author="CERN DEM JLC", ComponentHeight=5.8mm, Component Type=Standard, CreateDate=03.12.2007, HelpURL=\\cern.ch\dfs\Applications\Altium\Datasheets\CAE_PANASONIC_FK.pdf, LatestRevisionDate=05.11.2014, Mounted=Yes, Part Description="Aluminum Electrolytic SMT Capacitor", Part Number=CAE430-540_10UF_16V_20%, Pin Count=2, Sense=No, SMD=Yes, Socket=No, Status="Not Recommended"
FTG1 FTG2 FTG17: library part FIDUCIAL_TARGET_C100-200, "Fiducial Target", Author="CERN DEM JLC", ComponentHeight=0mm, Component Type="Standard (No BOM)", CreateDate=09.02.2010, Family=Fiducial, HelpURL=Undefined, LatestRevisionDate=04.04.2012, Mounted=No, PackageDescription="Round Fiducial Target, Top Layer, 1.0mm, Top Solder 2.0mm, Keepout =2.0mm", Part Description="Round Fiducial Target, Top Layer, 1.0mm, Top Solder 2.0mm, Keepout =2.0mm", Part Number=FIDUCIAL_TARGET_C100-200, Pin Count=1, Sense=No, SMD=Yes, Socket=No, Status=None
FTG18 FTG19 FTG20: library part FIDUCIAL_TARGET_S100-200, "Fiducial Target", Author="CERN DEM JLC", ComponentHeight=0mm, Component Type="Standard (No BOM)", CreateDate=09.02.2010, Family=Fiducial, HelpURL=Undefined, LatestRevisionDate=04.04.2012, Mounted=No, PackageDescription="Square Fiducial Target, Top Layer, 1.0mm, Top Solder 2.0mm, Keepout =2.0mm", Part Description="Square Fiducial Target, Top Layer, 1.0mm, Top Solder 2.0mm, Keepout =2.0mm", Part Number=FIDUCIAL_TARGET_S100-200, Pin Count=1, Sense=No, SMD=Yes, Socket=No, Status=None
IC2A IC2B: "Low Voltage 16-Bit Transceiver with 3-STATE Outputs and 25 Ohm Series Resistors in A Port Outputs", Case=TSSOP48, Manufacturer="FAIRCHILD SEMICONDUCTOR", Author="CERN DEM MR", Bonding=No, ComponentHeight=1.2mm, Component Type=Standard, CreateDate=06.12.2016, Device=74LVT162245MTD, HelpURL=\\cern.ch\dfs\Applications\Altium\Datasheets\74LVT162245MTD.pdf, LatestRevisionDate=06.12.2016, Manufacturer Part Number=74LVT162245MTD, Mounted=Yes, PackageDescription="SOP, 48-Leads, Body 12.6x6.2mm (max), Pitch 0.50mm, IPC Medium Density", Part Description="Low Voltage 16-Bit Transceiver with 3-STATE Outputs and 25 Ohm Series Resistors in A Port Outputs", Part Number=74LVT162245MTD, Pin Count=48, PressFit=No, Sense=No, SMD=Yes, Socket=No
J3A J3B J4A J4B J5A J5B J6A J6B: "MCX 50 OhmEnd Launch Jack Receptacle -Round C ontact", Manufacturer=Belfuse/Cinch, Manufacturer Part Number=133-3701-806, Part Number=Belfuse_133-3701-806, Author=GK, ComponentHeight=6mm, Component Type=Standard, CreateDate=31.01.2019, Family=MCX, HelpURL=\\cern.ch\dfs\Applications\Altium\Datasheets\AMPHENOL_919-383J-51A.pdf, LatestRevisionDate=31.01.2019, Mounted=Yes, Part Description="50 Ohm, RF Connector, MCX Right Angle PCB Receptacle Jack", Pin Count=5, PressFit=No, Sense=No, SMD=Yes, Socket=No, Status=None
J7: "Connector 2.54mm, 30 pin female, vertical, 7mm, AMPMODU HV-100/HV-190", Manufacturer="TYCO ELECTRONICS", Manufacturer Part Number=1-215307-5, Part Number=TYCO_1-215307-5, Author=GK, ComponentHeight=22.86mm, Component Type=Standard, CreateDate=05.10.2015, Family=AMPMODU, HelpURL=\\cern.ch\dfs\Applications\Altium\Datasheets\TYCO_3-1761606-1.pdf, LatestRevisionDate=05.10.2015, Mounted=Yes, Part Description="34 Contacts, Dual Row Vertical Low Profile IDC Shrouded Header, with Long Eject Latch", Pin Count=30, PressFit=No, Sense=No, SMD=No, Socket=No, Status=None
LD1 LD2: library part LED_DIALIGHT_551-1107F, "LED Red 1C 2A", Manufacturer=DIALIGHT, Manufacturer Part Number=551-1107F, Author="CERN DEM JLC", Bonding=No, Color=Red, ComponentHeight=7.11mm, Component Type=Standard, CreateDate=13.01.2009, HelpURL=\\cern.ch\dfs\Applications\Altium\Datasheets\LED_DIALIGHT_551-1107F.pdf, LatestRevisionDate=17.03.2010, Mounted=Yes, PackageDescription="Single 3mm Red LED, Body 6.35x4.32mm, Pin spacing 2.54mm", Part Description="Single 3mm Red LED CBI® Circuit Board Indicator", Part Number=LED_DIALIGHT_551-1107F, Pin Count=2, PressFit=No, Sense=No, SMD=No, Socket=No
LD15A LD15B LD16A LD16B LD17A LD17B LD18A LD18B: library part LED_AVAGO_HSME-C120, "LED Green 1C 2A", Manufacturer="AVAGO TECHNOLOGIES", Manufacturer Part Number=HSME-C120, Author="CERN DEM JMW", Bonding=No, Color=Green, ComponentHeight=0.7mm, ComponentLink1Description="Design Guide", ComponentLink1URL=\\cern.ch\dfs\Applications\Altium\Datasheets\LED_AVAGO_HSME-C110_DESIGN-GUIDE.pdf, Component Type=Standard, CreateDate=22.07.2009, HelpURL=\\cern.ch\dfs\Applications\Altium\Datasheets\LED_AVAGO_HSME-C120.pdf, LatestRevisionDate=20.06.2012, Mounted=Yes, PackageDescription="Green Chip LED, 2-Leads, Body 1.7x1.1mm, Side Emitting Package", Part Description="High Performance Right Angle Chip Green LED", Part Number=LED_AVAGO_HSME-C120, Pin Count=2, PressFit=No, Sense=No, SMD=Yes, Socket=No
LP1 LP2 LP3A LP3B LP4A LP4B LP5A LP5B LP6A LP6B: "LED Light_pipe_2.3x8mm", Manufacturer=FIX&FASTEN, Manufacturer Part Number=FIX-LEMB2-8V0-F, Part Number=FIX&FASTEN-LEMB2-8V0-F, Author=GK, Bonding=No, ComponentHeight=2.3mm, Component Type=Standard, CreateDate=24.01.2017, HelpURL=\\cern.ch\dfs\Applications\Altium\Datasheets\LEDLP_DIALIGHT_515-1049F.pdf, LatestRevisionDate=24.01.2017, Mounted=Yes, PackageDescription="Right Angle Single Element 2.3mmx8mm Round Lightpipe", Part Description="Right Angle Single Element 2.3x8mm Round Lightpipe", Pin Count=0, PressFit=No, Sense=No, SMD=No, Socket=No
R1 R2 R3A R3B R4A R4B R18A R18B R25A R25B: library part R0402_1K_1%_0.0625W_100PPM, "Resistor - 1%", Case=0402, Manufacturer=GENERIC, Manufacturer1 ComponentHeight=0.4mm, Manufacturer1 Example="YAGEO PHYCOMP", Manufacturer1 Part Number=232270671002L, Power=0.0625W, Tolerance=±1%, Author="CERN DEM JLC", Component Type=Standard, CreateDate=03.12.2007, HelpURL=\\cern.ch\dfs\Applications\Altium\Datasheets\R0402_Phycomp_RC0402.pdf, LatestRevisionDate=17.10.2012, Manufacturer Part Number=R0402_1K_1%_0.0625W_100PPM, Mounted=Yes, Part Description="General Purpose Thick Film Chip Resistor", Part Number=R0402_1K_1%_0.0625W_100PPM, Pin Count=2, PressFit=No, Sense=No, SMD=Yes, Socket=No, Status="Not Recommended", TC=±100ppm/°C
R12A R12B R14A R14B R15A R15B R17A R17B: library part R1210_30R_5%_0.5W_200PPM, "Resistor - 5%", Case=1210, Manufacturer=VISHAY, Manufacturer Part Number=CRCW121030R0JNEA, Part Number=R1210_30R_5%_0.5W_200ppm, Power=0.5W, Tolerance=±5%, Author="CERN DEM JMW", ComponentHeight=0.6mm, Component Type=Standard, CreateDate=06.08.2014, HelpURL=\\cern.ch\dfs\Applications\Altium\Datasheets\R1210_VISHAY_CRCW1210.pdf, LatestRevisionDate=06.08.2014, Mounted=Yes, Part Description="Thick Film Chip Resistor", Pin Count=2, PressFit=No, Sense=No, SMD=Yes, Socket=No, Status=None, TC=±200ppm/°C
R19A R19B R20A R20B R22A R22B R23A R23B R140A R140B R143A R143B R146A R146B R149A R149B: library part R0402_10K_1%_0.0625W_100PPM, "Resistor - 1%", Case=0402, Manufacturer=GENERIC, Manufacturer1 ComponentHeight=0.4mm, Manufacturer1 Example="YAGEO PHYCOMP", Manufacturer1 Part Number=232270671003L, Power=0.0625W, Tolerance=±1%, Author="CERN DEM JLC", Component Type=Standard, CreateDate=03.12.2007, HelpURL=\\cern.ch\dfs\Applications\Altium\Datasheets\R0402_Phycomp_RC0402.pdf, LatestRevisionDate=17.10.2012, Manufacturer Part Number=R0402_10K_1%_0.0625W_100PPM, Mounted=Yes, Part Description="General Purpose Thick Film Chip Resistor", Part Number=R0402_10K_1%_0.0625W_100PPM, Pin Count=2, Sense=No, SMD=Yes, Socket=No, Status="Not recommended", TC=±100ppm/°C
R26A R26B R27A R27B R28A R28B R29A R29B: library part R0402_22R_1%_0.0625W_100PPM, "Resistor - 1%", Case=0402, Manufacturer=GENERIC, Manufacturer1 ComponentHeight=0.4mm, Manufacturer1 Example="YAGEO PHYCOMP", Manufacturer1 Part Number=232270672209L, Power=0.0625W, Tolerance=±1%, Author="CERN DEM JLC", Component Type=Standard, CreateDate=03.12.2007, HelpURL=\\cern.ch\dfs\Applications\Altium\Datasheets\R0402_Phycomp_RC0402.pdf, LatestRevisionDate=17.10.2012, Manufacturer Part Number=R0402_22R_1%_0.0625W_100PPM, Mounted=Yes, Part Description="General Purpose Thick Film Chip Resistor", Part Number=R0402_22R_1%_0.0625W_100PPM, Pin Count=2, PressFit=No, Sense=No, SMD=Yes, Socket=No, Status="Not Recommended", TC=±100ppm/°C
R34 R35: library part R0603_0R_JUMPER, "Resistor", Case=0603, Manufacturer=GENERIC, Manufacturer1 ComponentHeight=0.55mm, Manufacturer1 Example="NIC COMPONENT", Manufacturer1 Part Number=NRC06Z0, Author="CERN DEM JLC", Component Type=Standard, CreateDate=03.12.2007, HelpURL=\\cern.ch\dfs\Applications\Altium\Datasheets\R0603_NIC_NRC.pdf, LatestRevisionDate=13.03.2008, Manufacturer Part Number=R0603_0R_JUMPER, Mounted=Yes, Part Description="1A (0.05R Max DC Resistance) Zero Ohm Jumper", Part Number=R0603_0R_JUMPER, Pin Count=2, PressFit=No, Sense=No, SMD=Yes, Socket=No, Status=Preferred
R139A R139B R142A R142B R145A R145B R148A R148B: library part R1210_49R9_1%_0.5W_100PPM_VISHAY_CRCW, "Resistor - 1%", Case=1210, Manufacturer="VISHAY DRALORIC", Manufacturer Part Number=CRCW121049R9FKTA, Power=0.5W, Tolerance=±1%, Author="CERN DEM JMW", ComponentHeight=0.6mm, Component Type=Standard, CreateDate=06.08.2014, HelpURL=\\cern.ch\dfs\Applications\Altium\Datasheets\R1210_VISHAY_CRCW1210.pdf, LatestRevisionDate=06.08.2014, Mounted=Yes, Part Description="Thick Film Chip Resistor", Part Number=R1210_49R9_1%_0.5W_100PPM_VISHAY_CRCW, Pin Count=2, Sense=No, SMD=Yes, Socket=No, Status=None, TC=±100ppm/°C
SW2A SW2B: library part SW_OMRON_A6S-4102-H, "4 Ways SPST DIP Switch", Manufacturer=OMRON, Manufacturer Part Number=A6S-4102-H, Author="CERN DEM JMW", ComponentHeight=3.8mm, Component Type=Standard, CreateDate=25.09.2008, Family=Switch, HelpURL=\\cern.ch\dfs\Applications\Altium\Datasheets\SW_OMRON_A6S-4102-H.pdf, LatestRevisionDate=25.09.2008, Mounted=Yes, PackageDescription="Pitch 2.54mm, Body 11.3x6.4mm, 4 Ways SPST Surface-Mounting DIP Switch, OMRON A6S-H", Part Description="4 Ways SPST DIP Switch, White Flat Actuator with Seal Tape, Contact Rating 25mA 24VDC", Part Number=SW_OMRON_A6S-4102-H, Pin Count=8, PressFit=No, Sense=No, SMD=Yes, Socket=No, Status=None
T1A T1B T2A T2B T3A T3B T4A T4B: "N-CHANNEL MOSFET WITH DIODE", Case=SOT23-3, Manufacturer="ON SEMICONDUCTOR", Author="CERN DEM JLC", Bonding=No, ComponentHeight=1.11mm, Component Type=Standard, CreateDate=23.03.2009, Device=BSS138LT1G, HelpURL=\\cern.ch\dfs\Applications\Altium\Datasheets\BSS138LT1G.pdf, LatestRevisionDate=23.03.2009, Manufacturer Part Number=BSS138LT1G, Mounted=Yes, PackageDescription="SOT23 3-Leads, Pitch 0.95mm - Body 1.4x3mm, IPC Medium Density", Part Description="50V 200mA N-Channel Enhancement Mode Field-Effect Transistor", Part Number=BSS138LT1G, Pin Count=3, PressFit=No, Sense=No, SMD=Yes, Socket=No

## Free pads (board coordinates)
  round 236.22 hole 125.98: 0(2299.21,299.21) 1(2299.21,3645.67) 2(1118.11,3645.67) 3(1118.11,299.21)

## Via types
v1: diameter 23.62, hole 11.81, L1 to L4, 96 vias